# Altium PCB CAN-to-CAN.PcbDoc
Units mil, origin at the board's own origin, x right, y up, seen from the top; angles counter-clockwise.
Board outline 6300 x 3720 mil, 2 copper layers (Top Layer, Bottom Layer); 110 components, 86 nets, 357 pads, 17 vias.
Unrouted connection lines stored in the file: 132.
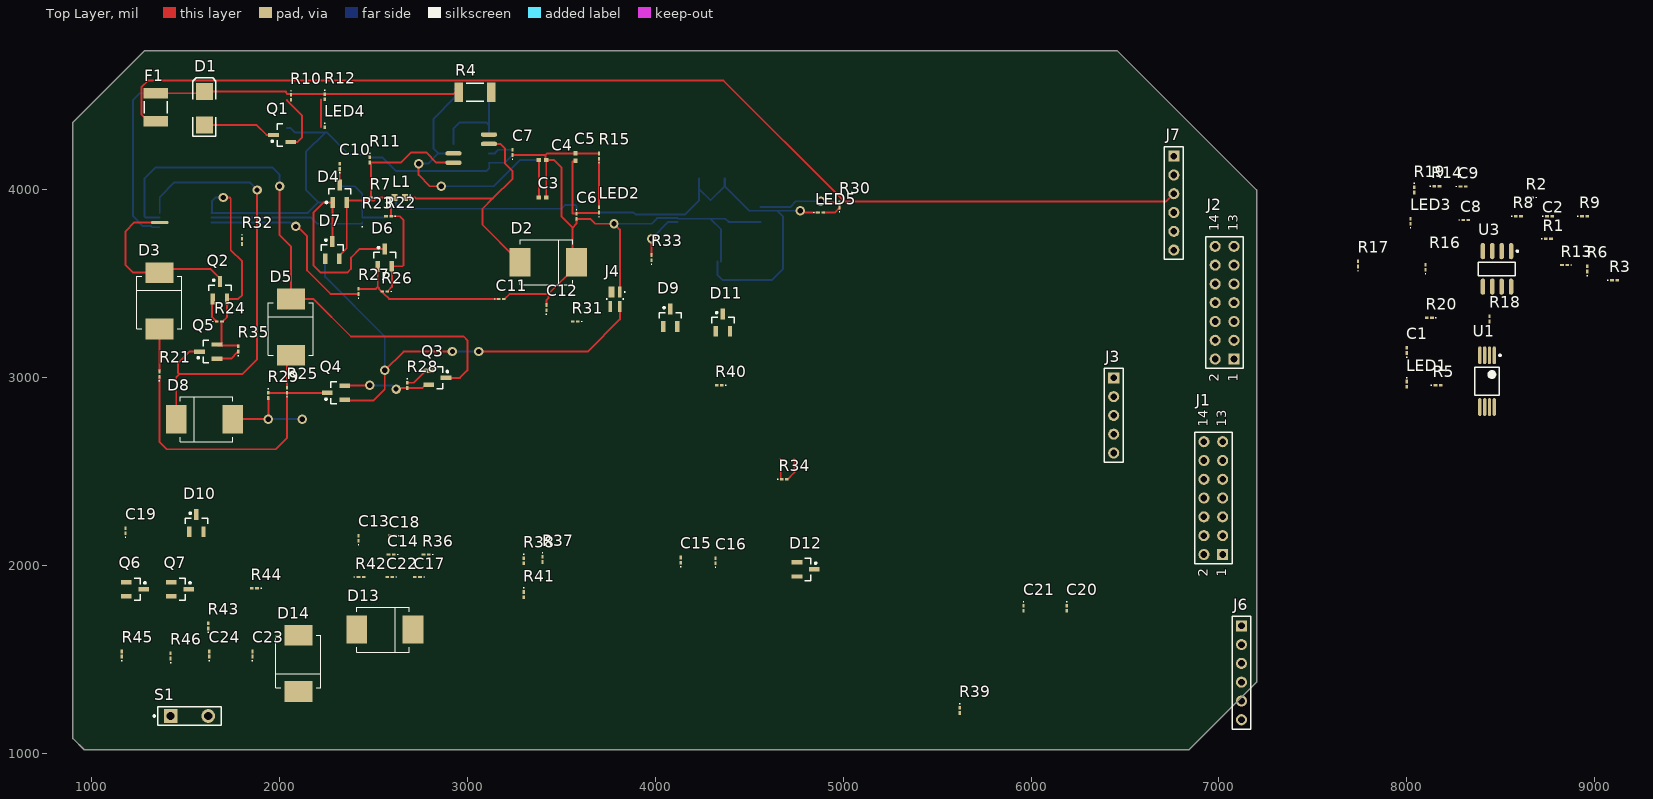
[diagram p0: Top Layer view]
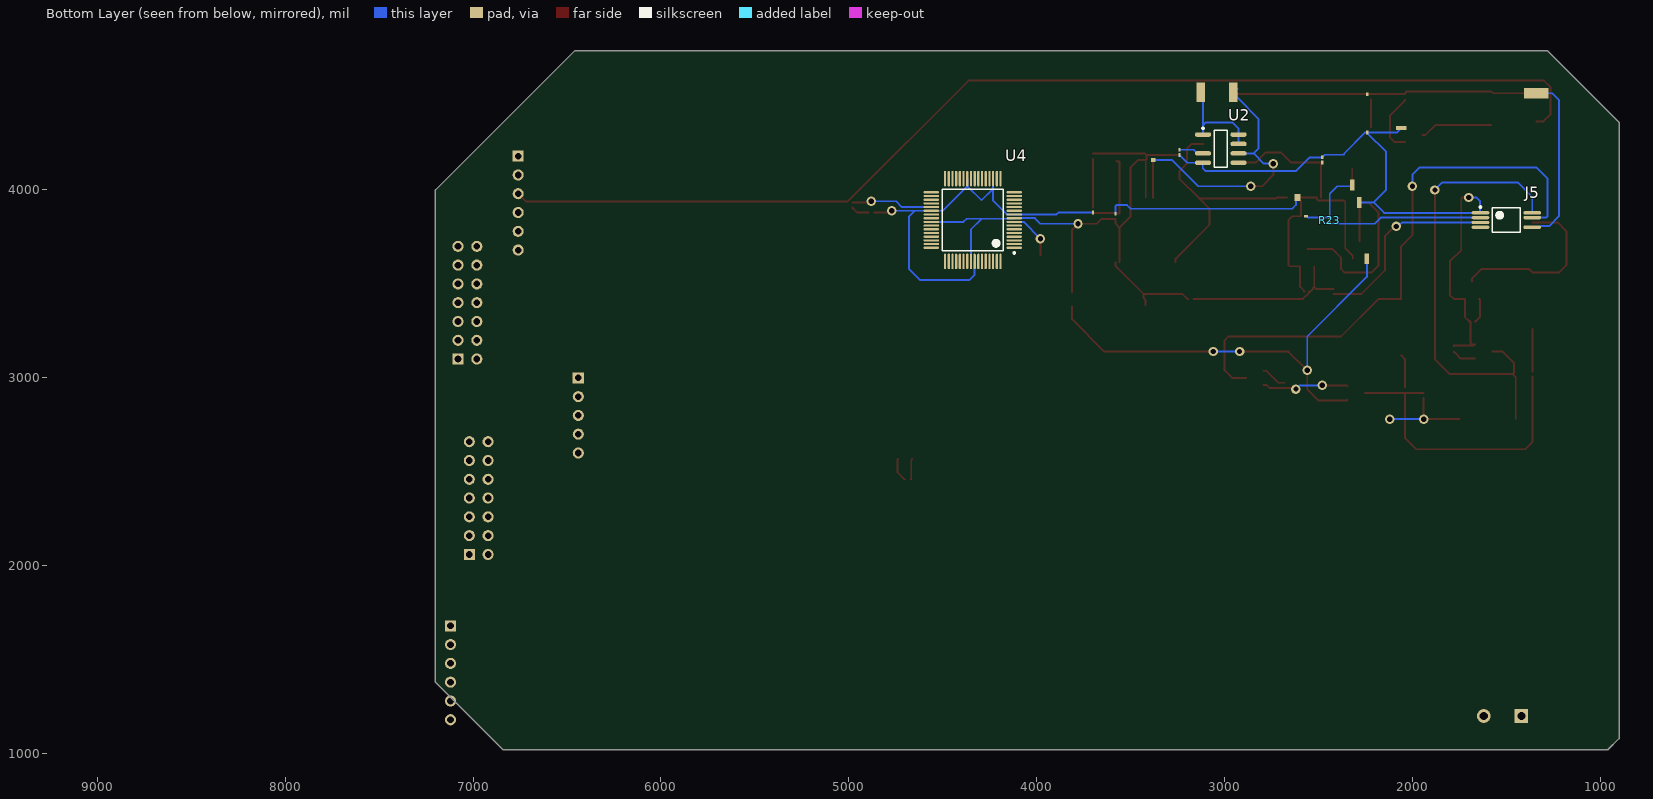
[diagram p1: Bottom Layer view, seen from below]

## Layer stack, top to bottom
Top Solder: solder mask 0.4, Solder Resist, Dk 3.5
Top Layer: signal copper 1.4
Dielectric 1: dielectric 12.6, FR-4, Dk 4.8
Bottom Layer: signal copper 1.4
Bottom Solder: solder mask 0.4, Solder Resist, Dk 3.5

## Board outline
960,1020 900,1080 900,4360 1280,4740 6460,4740 7200,4000 7200,1380 6840,1020

## Design rules (kind name [scope] priority, off if disabled: settings)
Clearance [All] p1: gap=6 ignorepadtopadclearanceinfootprint=FALSE except(0: SMDPad-Hole THPad-Hole Via-Hole Fill-Hole Poly-Hole Region-Hole Text-Hole; 10: THPad-THPad THPad-Via THPad-Fill THPad-Poly THPad-Region THPad-Text Via-Via Via-Fill Via-Poly Via-Region Via-Text Fill-Fill Fill-Poly Fill-Region Fill-Text Poly-Poly Poly-Region Poly-Text Region-Region Region-Text Text-Text)
PolygonConnect [All] p1: connectstyle=Relief reliefconductorwidth=10 reliefentries=4 polygonreliefangle="90 Angle" airgapwidth=10
RoomDefinition CAN-to-CAN [InComponentClass('CAN-to-CAN')] p1: confinementstyle=ConfineIn formatcopy=TRUE lockcomponents=FALSE outline 7240,1100 7560,1100 7560,1460 7240,1460
RoutingVias [All] p1: holewidth=28 width=50 viastyle="Through Hole" minholewidth=28 minwidth=50 maxholewidth=28 maxwidth=50
SolderMaskExpansion [All] p1: expansion=4
Width [All] p1: maxlimit=10 minlimit=10 preferedwidth=10
30 further rules are at their usual default settings.

## Components (designator, comment, footprint, x,y, rotation, side; value= is the part's Value field where it differs from the comment)
C1 "100n" 0603#1 8000,3146.22 r90 top
C2 "4n7" 0603#1 8760,3860 r0 top value=100n
C3 "100n" 0402#1 3400,3960 r0 top
C4 "10u/16" 0402#2 3400,4160 r0 top value=470u/16
C5 "100u/6V3" 0402#1 3575,4175 r90 top value=470u/16
C6 "100n" 0603#2 3580,3860 r270 top
C7 "100p" 0603#3 3240,4200 r90 top value=100pF
C8 "100n" 0603#1 8313.78,3840 r0 top
C9 "4n7" 0603#1 8300,4018 r0 top value=100n
C10 "100n" 0603#1 2320,4125.84 r90 top
C11 "100n" 0603#1 3180,3420 r0 top
C12 "100n" 0603#1 3420,3373.78 r90 top
C13 "100n" 0603#1 2420,2146.22 r90 top
C14 "100n" 0603#1 2593.78,2060 r180 top
C15 "100n" 0603#1 4135,2030 r90 top
C16 "100n" 0603#1 4320,2026.22 r90 top
C17 "27p" 0603#1 2733.78,1940 r180 top value=100n
C18 "27p" 0603#1 2600,2160 r180 top value=100n
C19 "100n" 0603#1 1180,2186.22 r90 top
C20 "100n" 0603#1 6190,1773.78 r270 top
C21 "100n" 0603#1 5960,1773.78 r270 top
C22 "100n" 0603#1 2586.22,1940 r180 top
C23 "100n" 0603#1 1855,1530 r90 top
C24 "10n" 0603#1 1625,1530 r90 top value=100pF
D1 "P6SMB15A" SMB 1600,4435 r90 top
D2 "LL5817" DIODE_SMC 3430,3615 r180 top
D3 "LL4148" DIODE_SMC 1360,3410 r270 top
D4 "BAT54S" SOT-23_M 2320,3980 r90 top
D5 "LL4148" DIODE_SMC 2060,3270 r270 top
D6 "BAT54S" SOT23_M#1 2560,3640 r90 top
D7 "BAT54S" SOT23_M#2 2280,3680 r90 top
D8 "LL4148" DIODE_SMC 1600,2780 r0 top
D9 "BAT54S" SOT23_M#1 4080,3320 r90 top
D10 "BAT54S" SOT23_M#1 1557.4,2226.26 r90 top
D11 "BAT54S" SOT23_M#1 4360,3293.74 r90 top
D12 "BAT54S" SOT23_M#1 4800,1980 r0 top
D13 "LL4148" DIODE_SMC 2560,1660 r180 top
D14 "LL4448" DIODE_SMC 2100,1480 r90 top
F1 "Fuse 1" 1812 1340,4439.8 r90 top
J1 "Header 7X2" HDR2X7 7020,2060 r90 top
J2 "Header 7X2" HDR2X7 7080,3100 r90 top
J3 "ZL201" HDR1X5 6440,3000 r270 top
J4 "MX-43045-0400" SOT-343_M 3785.59,3418.39 r270 top
J5 "MX-43045-0800" DB008_M#1 1500,3840 r180 bottom
J6 "MX-43045-0600" HDR1X6 7120,1680 r270 top
J7 "MX-43045-0600" HDR1X6 6760,4180 r270 top
L1 "DL22-330" INDC1608L 2640,3960 r180 top value=100uH
LED1 "HCL-1904AYL" 0603#1 8000,2966.22 r270 top
LED2 "HCL-1903BG4" 0603#2 3700,3893.78 r90 top
LED3 "HCL-1906BR1" 0603#1 8020,3833.78 r90 top
LED4 "HCL-1904AYL" 0603#4 2240,4320 r270 top
LED5 "HCL-1906BR1" 0603#1 4880,3880 r0 top
Q1 "BSS138" SOT23_M#3 2013.74,4292.6 r180 top
Q2 "BSS123" SOT23_M#1 1682.6,3466.26 r90 top
Q3 "BSS123" SOT23_M#1 2840,3000 r0 top
Q4 "BSS123" SOT23_M#1 2300,2920 r180 top
Q5 "BSS123" SOT23_M#1 1620,3140 r180 top
Q6 "BSS123" SOT23_M#1 1230,1875 r0 top
Q7 "BSS123" SOT23_M#1 1470,1875 r0 top
R1 "CAN0001" 0603#1 8753.78,3740 r0 top
R2 "CAN0001" 0603#1 8653.78,3960 r180 top
R3 "nc" 0603#1 9106.22,3520 r0 top value=1K
R4 "1R" 12Z-2010 3040,4520 r180 top value=1K
R5 "4k7" 0603#1 8166.22,2960 r0 top value=1K
R6 "1k" 0603#1 8960,3580 r90 top value=1K
R7 "3k6 1%" 0603#1 2500,3960 r180 top value=1K
R8 "68" 0603#1 8593.78,3860 r0 top value=1K
R9 "68" 0603#1 8946.22,3860 r0 top value=1K
R10 "1M" 0603#1 2060,4493.78 r270 top value=1K
R11 "1k2 1%" 0603#3 2480,4160 r270 top value=1K
R12 "4k7" 0603#2 2240,4496.22 r270 top value=1K
R13 "CAN0001" 0603#1 8840,3600 r180 top
R14 "CAN0001" 0603#1 8160,4020 r0 top
R15 "1k8" 0603#1 3700,4180 r90 top value=1K
R16 "nc" 0603#1 8100,3588.57 r90 top value=1K
R17 "4k7" 0603#1 7740,3606.22 r90 top value=1K
R18 "1k" 0603#1 8440,3313.78 r90 top value=1K
R19 "68" 0603#1 8040,4000 r270 top value=1K
R20 "68" 0603#1 8120,3320 r180 top value=1K
R21 "10k" 0603#1 1360,3020 r90 top value=1K
R22 "10k" 0603#5 2580,3860 r180 top value=1K
R23 "1k" 0603#6 2440,3840 r90 top value=1K
R24 "4k7" 0603#1 1680,3300 r0 top value=1K
R25 "10k" 0603#1 2040,2933.78 r90 top value=1K
R26 "10k" 0603#1 2560,3460 r180 top value=1K
R27 "1k" 0603#1 2420,3460 r90 top value=1K
R28 "4k7" 0603#1 2680,2960 r270 top value=1K
R29 "10k" 0603#1 1940,2906.22 r270 top value=1K
R30 "1k8" 0603#1 4980,3920 r90 top value=1K
R31 "10k" 0603#1 3573.78,3300 r180 top value=1K
R32 "1k" 0603#1 1800,3726.22 r270 top value=1K
R33 "nc" 0603#1 3980,3640 r90 top value=1K
R34 "4k7" 0603#1 4686.22,2460 r0 top value=1K
R35 "4k7" 0603#1 1780,3153.78 r90 top value=1K
R36 "10k" 0603#1 2780,2060 r180 top value=1K
R37 "10k" 0603#1 3400,2033.78 r270 top value=1K
R38 "10k" 0603#1 3300,2026.22 r270 top value=1K
R39 "470" 0603#1 5620,1230 r270 top value=1K
R40 "1k" 0603#1 4340,2960 r180 top value=1K
R41 "1k" 0603#1 3300,1846.22 r270 top value=1K
R42 "4k7" 0603#1 2433.78,1940 r0 top value=1K
R43 "10k" 0603#1 1620,1680 r90 top value=1K
R44 "4k7" 0603#1 1866.22,1880 r180 top value=1K
R45 "4k7" 0603#1 1160,1530 r90 top value=1K
R46 "4k7" 0603#1 1420,1520 r90 top value=1K
S1 "DTSM32NB" SPST-2 1520,1200 r0 top
U1 "MCP2551-I/SN" DB008_M#2 8427.2,2982.2 r270 top
U2 "MC33063AD" SO8_N#1 3020,4220 r180 bottom
U3 "MCP2551-I/SN" SO8_N#2 8480,3580 r270 top
U4 "PIC30F5011" ST-64-2_M 4340,3840 r0 bottom

## Footprints (in the part's own frame and the unit in brackets; to place one, negate y for a bottom-side part, rotate by r counter-clockwise, add the part's x,y. Pads: shape width x height; smd on the part's side, far side on the other; paste and mask are expansions set on the pad)
12Z-2010 [mm] "Chip Resistor, Body 5.0x2.5mm, IPC High Density"
  rect 1.2x2.6 all layers, no hole: 1(-2.2,0) 2(2.2,0)
  silkscreen extent -1.2,-1.2 1.2,1.2, body extent -2.58,-1.33 2.58,1.33, height 0.9
0402#1 [mm] "Chip Capacitor, Body 1.0x0.5mm, IPC High Density"
  rect 0.6x0.5 smd: 1(-0.5,0) 2(0.5,0)
  body extent -0.55,-0.3 0.55,0.3, height 1.3
0402#2 [mm] "Chip Capacitor, Body 1.0x0.5mm, IPC High Density"
  rect 0.6x0.5 all layers, no hole: 1(-0.5,0)
  rect 0.6x0.5 smd: 2(0.5,0)
  body extent -0.55,-0.3 0.55,0.3, height 1.3
0603#1 [mm] "Chip Inductor, Body 0.6x0.3mm, IPC High Density"
  rect 0.5x0.3 smd: 1(-0.35,0) 2(0.35,0)
  silkscreen extent -0.9,-0.05 -0.9,0.05, body extent -0.33,-0.18 0.33,0.18, height 0.55
0603#2 [mm] "Chip Inductor, Body 0.6x0.3mm, IPC High Density"
  rect 0.5x0.3 all layers, no hole: 1(-0.35,0)
  rect 0.5x0.3 smd: 2(0.35,0)
  silkscreen extent -0.9,-0.05 -0.9,0.05, body extent -0.33,-0.18 0.33,0.18, height 0.55
0603#3 [mm] "Chip Inductor, Body 0.6x0.3mm, IPC High Density"
  rect 0.5x0.3 all layers, no hole: 1(-0.35,0) 2(0.35,0)
  silkscreen extent -0.9,-0.05 -0.9,0.05, body extent -0.33,-0.18 0.33,0.18, height 0.55
0603#4 [mm] "Chip Inductor, Body 0.6x0.3mm, IPC High Density"
  rect 0.5x0.3 smd: 1(-0.35,0)
  rect 0.5x0.3 smd far side: 2(0.35,0)
  silkscreen extent -0.9,-0.05 -0.9,0.05, body extent -0.33,-0.18 0.33,0.18, height 0.55
0603#5 [mm] "Chip Inductor, Body 0.6x0.3mm, IPC High Density"
  rect 0.5x0.3 smd: 1(-0.35,0)
  rect 0.5x0.3 all layers, no hole: 2(0.35,0)
  silkscreen extent -0.9,-0.05 -0.9,0.05, body extent -0.33,-0.18 0.33,0.18, height 0.55
0603#6 [mm] "Chip Inductor, Body 0.6x0.3mm, IPC High Density"
  rect 0.5x0.3 smd far side: 1(-0.35,0) 2(0.35,0)
  silkscreen extent -0.9,-0.05 -0.9,0.05, body extent -0.33,-0.18 0.33,0.18, height 0.55
1812 [mm] "Chip Capacitor, Body 4.5x3.2mm, IPC High Density"
  rect 1.4x3.3 smd: 1(-1.9,0)
  rect 1.4x3.3 all layers, no hole: 2(1.9,0)
  silkscreen extent -0.8,-1.55 0.8,1.55, body extent -2.4,-1.7 2.4,1.7, height 1.4
DB008_M#1 [mm] "SOP, 8-Leads, Body 3x5.3mm, Pitch 0.65mm, IPC Low Density"
  oval 2.4x0.45 smd: 1(-3.5,0.975) 2(-3.5,0.325) 3(-3.5,-0.325) 4(-3.5,-0.975) 5(3.5,-0.975) 7(3.5,0.325) 8(3.5,0.975)
  oval 2.4x0.45 smd far side: 6(3.5,-0.325)
  silkscreen extent -3.63,-1.65 1.9,1.87, body extent -2.8,-1.65 2.8,1.65, height 2
DB008_M#2 [mm] "SOP, 8-Leads, Body 3x5.3mm, Pitch 0.65mm, IPC Low Density"
  oval 2.4x0.45 smd: 1(-3.5,0.975) 2(-3.5,0.325) 3(-3.5,-0.325) 4(-3.5,-0.975) 5(3.5,-0.975) 6(3.5,-0.325) 7(3.5,0.325) 8(3.5,0.975)
  silkscreen extent -3.62,-1.65 1.9,1.88, body extent -2.8,-1.65 2.8,1.65, height 2
DIODE_SMC [mil] "Diode; 2 Leads"
  rect 110x150 smd: 1(-150,0) 2(150,0)
  silkscreen extent -130,-120 150,120
HDR1X5 [mm] "Connector; Header; 5 Position"
  rect 1.5x1.5 hole 0.9: 1(0,0)
  round 1.5 hole 0.9: 2(2.54,0) 3(5.08,0) 4(7.62,0) 5(10.16,0)
  silkscreen extent -1.27,-1.27 11.43,1.27
HDR1X6 [mm] "Connector; Header; 6 Position"
  rect 1.5x1.5 hole 0.9: 1(0,0)
  round 1.5 hole 0.9: 2(2.54,0) 3(5.08,0) 4(7.62,0) 5(10.16,0) 6(12.7,0)
  silkscreen extent -1.27,-1.27 13.97,1.27
HDR2X7 [mm] "Connector; Header; 7x2 Position"
  rect 1.5x1.5 hole 0.9: 1(0,0)
  round 1.5 hole 0.9: 2(0,2.54) 3(2.54,0) 4(2.54,2.54) 5(5.08,0) 6(5.08,2.54) 7(7.62,0) 8(7.62,2.54) 9(10.16,0) 10(10.16,2.54) 11(12.7,0) 12(12.7,2.54) 13(15.24,0) 14(15.24,2.54)
  silkscreen extent -1.27,-1.27 16.51,3.81
INDC1608L [mm] "Chip Inductor, Body 1.6x0.8mm, IPC High Density"
  rect 0.8x0.9 smd: 1(-0.7,0)
  rect 0.8x0.9 all layers, no hole: 2(0.7,0)
  silkscreen extent -1.4,-0.35 -1.4,0.35, body extent -0.87,-0.48 0.87,0.48, height 0.55
SMB [mm] "DO-214-AA/SMB; 2 C-Bend Leads; Body 5.3 x 3.6 mm, inc. leads (LxW)"
  rect 2.3x2.3 smd: 1(-2.25,0) 2(2.25,0)
  silkscreen extent -3.8,-1.55 4.1,1.55
SO8_N#1 [mm] "SOIC, 8-Leads, Body 4.9x3.9mm, Pitch 1.27mm, IPC Medium Density"
  oval 2.2x0.6 all layers, no hole: 1(-2.4,1.905) 5(2.4,-1.905) 6(2.4,-0.635)
  oval 2.2x0.6 smd far side: 2(-2.4,0.635)
  oval 2.2x0.6 smd: 3(-2.4,-0.635) 4(-2.4,-1.905) 7(2.4,0.635) 8(2.4,1.905)
  silkscreen extent -2.53,-2.5 0.9,2.88, body extent -2,-2.5 2,2.5, height 1.75
SO8_N#2 [mm] "SOIC, 8-Leads, Body 4.9x3.9mm, Pitch 1.27mm, IPC Medium Density"
  oval 2.2x0.6 smd: 1(-2.4,1.905) 2(-2.4,0.635) 3(-2.4,-0.635) 4(-2.4,-1.905) 5(2.4,-1.905) 6(2.4,-0.635) 7(2.4,0.635) 8(2.4,1.905)
  silkscreen extent -2.52,-2.5 0.9,2.88, body extent -2,-2.5 2,2.5, height 1.75
SOT23_M#1 [mm] "SOT23, 3-Leads, Body 2.9x1.3mm, Pitch 0.95mm, Lead Span 2.3mm - Reverse Pinning, IPC Low Density"
  rect 1.45x0.6 smd: 1(1.175,0) 2(-1.175,-0.95) 3(-1.175,0.95)
  silkscreen extent -0.1,-1.5 1.47,1.5, body extent -0.7,-1.5 0.7,1.5, height 1.1
SOT23_M#2 [mm] "SOT23, 3-Leads, Body 2.9x1.3mm, Pitch 0.95mm, Lead Span 2.3mm - Reverse Pinning, IPC Low Density"
  rect 1.45x0.6 smd: 1(1.175,0) 2(-1.175,-0.95)
  rect 1.45x0.6 all layers, no hole: 3(-1.175,0.95)
  silkscreen extent -0.1,-1.5 1.47,1.5, body extent -0.7,-1.5 0.7,1.5, height 1.1
SOT23_M#3 [mm] "SOT23, 3-Leads, Body 2.9x1.3mm, Pitch 0.95mm, Lead Span 2.3mm - Reverse Pinning, IPC Low Density"
  rect 1.45x0.6 smd: 1(1.175,0) 3(-1.175,0.95)
  rect 1.45x0.6 smd far side: 2(-1.175,-0.95)
  silkscreen extent -0.1,-1.5 1.47,1.5, body extent -0.7,-1.5 0.7,1.5, height 1.1
SOT-23_M [mm] "SOT23, 3-Leads, Body 2.9x1.3mm, Pitch 0.95mm, Lead Span 2.5mm, IPC Low Density"
  rect 1.45x0.6 all layers, no hole: 1(-1.175,0.95) 3(1.175,0)
  rect 1.45x0.6 smd: 2(-1.175,-0.95)
  silkscreen extent -1.3,-1.5 0.7,1.92, body extent -0.7,-1.5 0.7,1.5, height 1.1
SOT-343_M [mm] "SOT343, 4-Leads, Body 2x1.3 mm, Pitch 1.3mm, Lead Span 2.1mm, IPC Low Density"
  rect 1.45x0.5 smd: 1(-0.975,0.65) 3(0.975,-0.65) 4(0.975,0.65)
  rect 1.45x0.8 smd: 2(-0.975,-0.5)
  silkscreen extent -1.02,-1.1 0.1,1.35, body extent -0.7,-1.1 0.7,1.1, height 1
SPST-2 [mm] "Switch; 2 Leads"
  rect 1.85x1.85 hole 1.1: 1(-2.54,0)
  round 1.85 hole 1.1: 2(2.54,0)
  silkscreen extent -4.89,-1.27 4.28,1.27
ST-64-2_M [mm] "Thin QFP, 64-Leads, Body 10x10mm, Pitch 0.5mm, IPC Low Density"
  oval 2.1x0.3 smd: 1(-5.6,3.75) 2(-5.6,3.25) 3(-5.6,2.75) 4(-5.6,2.25) 5(-5.6,1.75) 6(-5.6,1.25) 7(-5.6,0.75) 8(-5.6,0.25) 9(-5.6,-0.25) 10(-5.6,-0.75) 11(-5.6,-1.25) 12(-5.6,-1.75) 13(-5.6,-2.25) 14(-5.6,-2.75) 15(-5.6,-3.25) 16(-5.6,-3.75) 33(5.6,-3.75) 34(5.6,-3.25) 35(5.6,-2.75) 36(5.6,-2.25) 37(5.6,-1.75) 38(5.6,-1.25) 39(5.6,-0.75) 40(5.6,-0.25) 41(5.6,0.25) 42(5.6,0.75) 43(5.6,1.25) 44(5.6,1.75) 45(5.6,2.25) 46(5.6,2.75) 47(5.6,3.25) 48(5.6,3.75)
  oval 0.3x2.1 smd: 17(-3.75,-5.6) 18(-3.25,-5.6) 19(-2.75,-5.6) 20(-2.25,-5.6) 21(-1.75,-5.6) 22(-1.25,-5.6) 23(-0.75,-5.6) 24(-0.25,-5.6) 25(0.25,-5.6) 26(0.75,-5.6) 27(1.25,-5.6) 28(1.75,-5.6) 29(2.25,-5.6) 30(2.75,-5.6) 31(3.25,-5.6) 32(3.75,-5.6) 49(3.75,5.6) 50(3.25,5.6) 51(2.75,5.6) 52(2.25,5.6) 53(1.75,5.6) 54(1.25,5.6) 55(0.75,5.6) 56(0.25,5.6) 57(-0.25,5.6) 58(-0.75,5.6) 59(-1.25,5.6) 60(-1.75,5.6) 61(-2.25,5.6) 62(-2.75,5.6) 63(-3.25,5.6) 64(-3.75,5.6)
  silkscreen extent -5.72,-4.15 4.15,4.57, body extent -5,-5 5,5, height 1.6

## Part data
C1 C2 C3 C6 C7 C8 C9 C10 C11 C12 C13 C14 C15 C16 C17 C18 C19 C20 C21 C22 C23 C24: library part Cap, "Capacitor", LatestRevisionDate=17-Jul-2002, LatestRevisionNote="Re-released for DXP Platform.", PackageReference=RAD-0.3, Published=8-Jun-2000, Publisher="Altium Limited"
C4 C5: library part "Cap Pol1", "Polarized Capacitor (Radial)", LatestRevisionDate=17-Jul-2002, LatestRevisionNote="Re-released for DXP Platform.", PackageReference=RB7.6-15, Published=8-Jun-2000, Publisher="Altium Limited"
D1: library part "D Zener", "Zener Diode", LatestRevisionDate=17-Jul-2002, LatestRevisionNote="Re-released for DXP Platform.", PackageReference=DIODE-0.7, Published=8-Jun-2000, Publisher="Altium Limited"
D2 D3 D5 D8 D13: library part 1N4148, "High Conductance Fast Diode", Code_JEDEC=DO-204-AH, ComponentLink1Description="Manufacturer Link", ComponentLink1URL=http://www.fairchildsemi.com/, ComponentLink2Description=Datasheet, ComponentLink2URL=http://www.fairchildsemi.com/ds/1N%2F1N4148.pdf, DatasheetDocument=1997, LatestRevisionDate=17-Jul-2002, LatestRevisionNote="Re-released for DXP Platform.", PackageReference=DO-35, Published=8-Jun-2000, Publisher="Altium Limited"
D4 D6 D7 D9 D10 D11 D12: "Schottky Barrier Double Diode", ComponentLink1Description="Manufacturer Link", ComponentLink1URL=http://www.semiconductors.philips.com/, ComponentLink2Description=Datasheet, ComponentLink2URL=http://www.semiconductors.philips.com/acrobat/datasheets/BAT54_SERIES_4.pdf, DatasheetVersion=4-Mar-2002, LatestRevisionDate=12-Dec-2006, LatestRevisionNote="IPC-7351 Footprint Added.", PackageDescription="3-Pin SOT-23 Package 0.95 mm Pitch, 2.3 mm Lead Span", PackageReference=SOT23, PackageVersion=May-1999, Published=17-Sep-2003, Publisher="Altium Limited"
D14: library part Diode, "Default Diode", PackageDocument=Sep-1996, Code_JEDEC=DO-214-AB, LatestRevisionDate=17-Jul-2002, LatestRevisionNote="Re-released for DXP Platform.", PackageReference=SMC, Published=8-Jun-2000, Publisher="Altium Limited"
F1: "Fuse", LatestRevisionDate=17-Jul-2002, LatestRevisionNote="Re-released for DXP Platform.", PackageReference=PIN-W2/E2.8, Published=8-Jun-2000, Publisher="Altium Limited"
J1 J2: "Header, 7-Pin, Dual row", LatestRevisionDate=17-Jul-2002, LatestRevisionNote="Re-released for DXP Platform.", Publisher="Altium Limited"
J3: library part CON5, "Connector"
J4: library part "Header 2X2", "Header, 2-Pin, Dual row", LatestRevisionDate=17-Jul-2002, LatestRevisionNote="Re-released for DXP Platform.", Publisher="Altium Limited"
J5: library part "Header 4X2A", "Header, 4-Pin, Dual row", LatestRevisionDate=17-Jul-2002, LatestRevisionNote="Re-released for DXP Platform.", Publisher="Altium Limited"
J6 J7: library part "Header 6", "Header, 6-Pin", LatestRevisionDate=17-Jul-2002, LatestRevisionNote="Re-released for DXP Platform.", Publisher="Altium Limited"
L1: library part "Inductor Iron", "Magnetic-Core Inductor", Published=24-Mar-1999, Publisher="Altium Limited", Revision="July-2002: Re-released for DXP Platform."
LED1 LED2 LED3 LED4 LED5: library part LED3, "Typical BLUE SiC LED", Published=8-Jun-2000, Publisher="Altium Limited", Revision 1="Jul-2002: Re-released for DXP Platform.", Revision 2="17-Dec-2003: PCB Footprint replaced."
Q1: "N-Channel Enhancement Mode Vertical DMOS FET", ComponentLink1Description="Manufacturer Link", ComponentLink1URL=http://www.zetex.com/, ComponentLink2Description=Datasheet, ComponentLink2URL=www.zetex.com/3.0/pdf/BSS138.pdf, DatasheetVersion=Mar-96, PackageDescription="SOT-23; 3 Leads; Body 3.1 x 2.5 mm, inc. leads (LxW max), Alternate Lead Configuration", PackageReference=SOT23, PackageVersion=1996, Published=17-Dec-2003, Publisher="Altium Limited"
Q2 Q3 Q4 Q5 Q6 Q7: "N-channel Enhancement Mode Vertical D-MOSFET", ComponentLink1Description="Manufacturer Link", ComponentLink1URL=http://www.semiconductors.philips.com/, ComponentLink2Description=Datasheet, ComponentLink2URL=http://www.semiconductors.philips.com/acrobat/datasheets/BSS123_3.pdf, DatasheetVersion=Apr-1995, LatestRevisionDate=12-Dec-2006, LatestRevisionNote="IPC-7351 Footprint Added.", PackageDescription="3-Pin SOT-23 Package 0.95 mm Pitch, 2.3 mm Lead Span", PackageReference=SOT23, PackageVersion=May-1999, Published=17-Sep-2003, Publisher="Altium Limited"
R1 R2 R13 R14: library part "Res Varistor", "Varistor (Voltage-Sensitive Resistor)", LatestRevisionDate=04-Mar-2005, LatestRevisionNote="PCB Footprint replaced.", PackageReference=6-0805, Published=24-Mar-1999, Publisher="Altium Limited"
R3 R4 R5 R6 R7 R8 R9 R10 R11 R12 R15 R16 R17 R18 R19 R20 R21 R22 R23 R24 R25 R26 R27 R28 R29 R30 R31 R32 R33 R34 R35 R36 R37 R38 R39 R40 R41 R42 R43 R44 R45 R46: library part Res2, "Resistor", LatestRevisionDate=17-Jul-2002, LatestRevisionNote="Re-released for DXP Platform.", PackageReference=AXIAL-0.4, Published=8-Jun-2000, Publisher="Altium Limited"
S1: library part PUSHB, "Switch PushButton"
U1 U3: "High Speed CAN Transceiver, 8-Pin Plastic SOIC, Industrial Grade", Code_JEDEC=MS-012, ComponentLink1Description="Manufacturer Link", ComponentLink1URL=http://www.microchip.com, ComponentLink2Description=Datasheet, ComponentLink2URL=http://ww1.microchip.com/downloads/en/DeviceDoc/21667d.pdf, DatasheetVersion=Nov-2003, LatestRevisionDate=13-Apr-2006, LatestRevisionNote="IPC-7351 Footprint Added.", PackageDescription="8-Pin Plastic Narrow Body Small Outline Integrated Circuit 1.27 mm Pitch", PackageReference=SOIC150-8, PackageVersion=Oct-2005, Published=6-Oct-2005, Publisher="Altium Limited"
U2: "DC-to-DC Converter Control Circuit", Code_IPC=SOIC127P600-8, Code_JEDEC=MS-012-AA, ComponentLink1Description="Manufacturer Link", ComponentLink1URL=http://www.onsemi.com/site/products/taxonomy/0,4438,503,00.html, ComponentLink2Description=Datasheet, ComponentLink2URL=http://www.onsemi.com/pub/Collateral/MC34063A-D.PDF, DatasheetVersion=1988, LatestRevisionDate=13-Apr-2006, LatestRevisionNote="IPC-7351 Footprint Added.", PackageDescription="8-Pin Small Outline Integrated Circuit 1.27 mm Pitch", PackageReference=751-02, Published=17-Jul-2002, Publisher="Altium Limited"
U4: "PIC30F5011 - Up"

## Via types
v1: diameter 50, hole 28, Top Layer to Bottom Layer, 17 vias

## Nets (pads, with @x,y where several pads share a name; then routed paths per layer and width w, separated by ;. In a path a pad name is that pad's centre, name@x,y a point inside that pad or via, vN(x,y) a via of type N, cw(c..) or ccw(c..) an arc to the next point about the centre after c; other vN are vias at no path point)
+5V: C1.1 C5.1 C6.1 C8.1 C13.1 C14.1 C15.1 C16.1 C22.1 D4.2 D6.2 D7.2 D9.2 D10.2 D11.2 D12.2 D13.2 D14.2 J1.2 J2.2 J2.4 J2.6 J3.2 J4.2 L1.2 LED1.1 LED2.1 LED3.1 LED5.1 R7.1 R22.1 R26.1 R31.1 R36.1 R37.1 R38.1 R42.1 R43.2 U1.3 U3.3 U4.10 U4.19 U4.26 U4.38 U4.57 | length 5017.6
  Top Layer w10: D7.2 2317.4,3650.47 2357.4,3690.47 D4.2 2357.4,3936.28 2364.21,3943.09 2500.62,3943.09 2508.94,3951.41 2508.94,3959.09 2509.84,3960 R7.1 L1.2 2612.44,3958.03 2593.78,3939.37 R22.1 2640,3860 2660,3840 2660,3600 2653.74,3593.74 D6.2 2597.4,3483.62 2578.62,3464.84 2578.62,3460.91 2577.72,3460 R26.1 ; C5.1 3570.91,4151.22 3559.09,4151.22 3559.09,3874.68 3560,3873.78 C6.1 3580,3875.98 3580.91,3876.89 3699.09,3876.89 3700,3877.8 LED2.1 ; v1(4770.79,3889.21) 4781.61,3889.21 4790.82,3880 LED5.1
  Bottom Layer w10: L1.2 2620,3952.44 2620,3920 2640,3900 3500,3900 3520,3920 3575.08,3920 3580,3915.08 C6.1 ; LED2.1 3884.6,3880 3895.07,3869.53 U4.10 4119.87,3869.87 4159.53,3869.87 4232.08,3942.42 4232.08,4006.63 ; U4.19 4232.08,4060.13 4232.08,4006.63 ; U4.57 4330.16,3549.84 4360,3520 4620,3520 4680,3580 4680,3858.43 4649.21,3889.21 ; v1(4770.79,3889.21) 4649.21,3889.21 ; 4232.08,4006.63 4293.71,3945 4369.18,4020.47 4369.18,4060.13 U4.26 4369.87,4060.13 4369.87,4020.47 4501.13,3889.21 U4.38 4649.21,3889.21
+12V: C3.1 C4.1 D1.2 F1.2 J5.5 R4.2 R10.1 R12.1 U2.6 | length 4159.4
  Top Layer w10: F1.2 1571.02,4514.61 1580,4523.58 D1.2 2034.14,4523.58 2034.14,4517.35 2041.5,4510 R12.1 2924.76,4510 2943.39,4528.62 R4.2@2943.39,4550 ; v1(2740,4140) 2740,4080 2800,4020 v1(2860,4020) ; C3.1@3378.35,3960 C3.1 C4.1
  Bottom Layer w10: F1.2 1254.61,4514.61 1220,4480 1220,3860 1272.65,3807.35 1316,3807.35 1321.73,3801.61 J5.5 ; v1(2740,4140) 2790,4140 2845,4195 ; v1(2860,4020) 3140,4020 3280,4160 C4.1 ; U2.6 2845,4195 ; R4.2@2931.02,4537.64 R4.2@2943.39,4550 ; R4.2@2933.39,4520 2933.39,4492.44 2820,4379.06 2820,4220 2845,4195
+12VPWR: F1.1 J6.3 J7.3 | length 6028.7
  Top Layer w10: F1.1 1302.6,4365 1264.04,4403.56 1264.04,4546.72 1299.5,4582.18 4362.9,4582.18 5005.61,3939.47 6719.47,3939.47 J7.3
ADC0: J1.4
ADC1: J1.6
ADC2: J1.8
ADC3: J1.10
ADC4: J1.12
ButD: C10.1 D4.3 R22.2 R23.2 | length 480
  Top Layer w10: D4.3 C10.1
  Bottom Layer w10: D4.3 2326.26,4020 2400,4020 2440,3980 R23.2 2556.06,3853.78 2562.28,3860 R22.2
ButD_IN: J5.2 R23.1 | length 820.7
  Bottom Layer w10: J5.2 2167.2,3852.8 2200,3820 2433.78,3820 2435.16,3821.38 2439.09,3821.38 2440,3822.28 R23.1
ButN: C11.1 D6.3 R26.2 R27.2 | length 893.6
  Top Layer w10: R27.2 2512.76,3473.78 2522.6,3483.62 ; D6.3 2522.6,3483.62 ; C11.1 2582.47,3420 2551.06,3451.41 2551.06,3459.09 2550.16,3460 2542.28,3460 2528.46,3473.83 2528.46,3477.76 2522.6,3483.62
ButN_IN: J5.3 R27.1 | length 1047
  Top Layer w10: v1(2085.86,3805.86) 2094.14,3805.86 2146,3754 2146,3571.37 2271.15,3446.22 R27.1
  Bottom Layer w10: J5.3 2053.69,3827.2 2075.03,3805.86 v1(2085.86,3805.86)
ButR: C12.1 D9.3 R31.2 R32.2
ButR_IN: J5.4 R32.1
CAN_BMS_TX: R17.2
CAN_BMSS_H: J7.1 R13.2 R20.1 U3.7
CAN_BMSS_L: J7.2 R14.1 R19.1 U3.6
CAN_MUX_RX: U1.4
CAN_MUX_TX: R5.2 U1.1
CAN_MUXED_H: J6.1 R1.2 R9.1 U1.7
CAN_MUXED_L: J6.2 R2.1 R8.1 U1.6
ChrgLED: Q6.3 R45.1
ChrgLED_OUT: J7.6 Q6.1
FluidHeater: Q7.3 R46.1
FluidHeater_OUT: J6.6 Q7.1
GND: C1.2 C2.1 C3.2 C4.2 C5.2 C6.2 C7.1 C8.2 C9.1 C10.2 C11.2 C12.2 C13.2 C14.2 C15.2 C16.2 C17.2 C18.2 C19.2 C20.2 C21.2 C22.2 C23.1 C24.1 D2.1 D4.1 D6.1 D7.1 D9.1 D10.1 D11.1 D12.1 J1.14 J2.12 J2.14 J3.3 J4.1 J5.1 LED4.2 Q1.2 Q2.2 Q3.2 Q4.2 Q5.2 Q6.2 Q7.2 R1.1 R2.2 R6.2 R11.1 R13.1 R14.2 R15.2 R18.2 R24.2 R28.2 R34.2 R35.2 R45.2 R46.2 S1.1 U1.2 U2.4 U3.2 U4.9 U4.20 U4.25 U4.41 U4.56 | length 8887.7
  Top Layer w10: v1(1700,3960) 1734.14,3960 1740,3954.14 1740,3680 1800,3620 1800,3440 1780,3420 Q2.2 1720,3322.28 1697.72,3300 R24.2 1690.71,3300 1689.8,3299.09 1689.8,3184.21 1682.99,3177.4 Q5.2 1671.26,3172.4 1779.09,3172.4 1780,3171.5 R35.2 ; D7.1 2281.3,3727.56 2281.3,3932.44 2232.44,3932.44 2180,3880 2180,3600 2220,3560 2360,3560 2380,3580 2380,3640 2426.26,3686.26 D6.1 ; Q4.2 2347.56,2958.7 2478.7,2958.7 v1(2480,2960) ; v1@2640,2940 2646.22,2946.22 R28.2 2760.63,2946.22 2777.01,2962.6 Q3.2 ; C11.2 3197.72,3420 3223.94,3446.22 3431.22,3446.22 ; C7.1 3416.54,4186.22 ; C3.2 C4.2 ; C12.2 3420,3413.25 3431.22,3424.47 3431.22,3446.22 ; D2.1@3560,3615 3560,3800 ; D2.1 3580,3595 3431.22,3446.22 ; R15.2 3699.55,4194.23 3575,4194.23 3555.45,4194.23 3555,4194.69 3425,4194.69 3416.54,4186.22 ; J4.1 3811.18,3788.82 v1(3780,3820) 3680,3820 3653.78,3846.22 C6.2 3580,3820 3560,3800 ; R34.2 4703.94,2460 4740,2496.06 4740,2564.88 4737.4,2567.48 ; 3416.54,4186.22 3415.16,4184.84 3415.16,4164.53 C4.2 ; C4.2 3460,4160 3500,4120 3500,3860 3560,3800
  Bottom Layer w10: v1(1700,3960) 1660,3960 1640,3940 1640,3880.59 J5.1 2150.91,3878.39 2206.26,3933.74 ; Q1.2@2040,4330 2056.73,4330 2080.51,4306.22 LED4.2 ; D4.1 2206.26,3933.74 ; v1(2480,2960) 2600,2960 v1(2620,2940) ; C7.1 3240,4182.28 3239.09,4181.38 3235.16,4181.38 3198.78,4145 U2.4 3115.86,4143.63 3115.86,4115.86 3100,4100 2620,4100 2546.22,4173.78 R11.1 2480,4177.72 2479.09,4178.62 2475.16,4178.62 2466.22,4187.56 2365,4187.56 2365,4191.5 2250.28,4306.22 LED4.2 ; v1(3780,3820) 3980,3820 4009.84,3849.84 U4.9 4122.31,3847.06 4292.94,3847.06 ; U4.56 4349.5,3619.87 4349.5,3790.5 4292.94,3847.06 ; U4.41 4389.84,3830.16 4372.94,3847.06 4292.94,3847.06 ; 2206.26,3933.74 2140,4000 2140,4202.28 2240,4302.28 LED4.2
GPIOC13: J2.3
GPIOC14: J2.1
GPIOD0: J2.5
GPIOD1: J1.13
GPIOD2: J1.11
GPIOD3: J1.9
GPIOD4: J1.7
GPIOD5: J1.5
GPIOD6: J1.3
GPIOD7: J1.1
GPIOD8: J2.13
GPIOD9: J2.11
GPIOD10: J2.9
GPIOD11: J2.7
GROUND: D1.1 J6.4 J7.4 Q1.1 | length 389.8
  Top Layer w10: D1.1@1580,4346.42 1876.93,4346.42 1930.75,4292.6 Q1.1@1947.48,4292.6
ILUM: D7.3 J4.4 Q4.3 R34.1 | length 2611.1
  Top Layer w10: Q4.3 2348.86,2880 2500,2880 2560,2940 v1(2560,3040) 2660,3140 v1(2920,3140) ; v1(3060,3140) 3640,3140 3811.18,3311.18 J4.4 ; 4662.6,2567.48 4667.6,2562.48 4667.6,2460.91 4668.5,2460 R34.1
  Bottom Layer w10: D7.3 2242.6,3537.4 2560,3220 v1(2560,3040) ; v1(2920,3140) v1(3060,3140)
IMP: C19.1 D10.3 R36.2 R39.2
IMP_IN: J4.3 R39.1
IsFHerror: C21.1 D12.3 R38.2 R41.2
IsFHerror_IN: J6.5 R41.1
IsHeating: C20.1 D11.3 R37.2 R40.2
IsHeating_IN: J7.5 R40.1
LightD: Q2.3 R24.1 | length 135.3
  Top Layer w10: Q2.3 1640,3414.8 1640,3326.22 1661.38,3304.84 1661.38,3300.91 1662.28,3300 R24.1
LightD_OUT: D3.1 J5.6 Q2.1 | length 947
  Top Layer w10: J5.6 1227.2,3827.2 1180,3780 1180,3600 1220,3560 D3.1 1380,3580 1631.85,3580 1682.6,3529.25 Q2.1
LightN: Q3.3 R28.1 | length 140.1
  Top Layer w10: R28.1 2713.39,2973.78 2777.01,3037.4 Q3.3
LightN_OUT: D5.1 J5.7 Q3.1 | length 3072.9
  Top Layer w10: v1(2000,4020) 2000,3760 2060,3700 D5.1 2180,3420 2380,3220 2980,3220 3000,3200 3000,3040 2960,3000 Q3.1
  Bottom Layer w10: J5.7 1287.2,3852.8 1280,3860 1280,4060 1340,4120 1960,4120 2000,4080 v1@2000,4000
LightR: Q5.3 R35.1 | length 131.5
  Top Layer w10: Q5.3 1742.6,3102.6 1775.16,3135.16 1779.09,3135.16 1780,3136.06 R35.1
LightR_OUT: D8.1 J5.8 Q5.1 | length 2445.3
  Top Layer w10: D8.1 1450,3004.14 1465.86,3020 ; Q5.1 1520,3140 1460,3080 1460,3025.86 1465.86,3020 ; v1(1880,4000) 1880,3100 1800,3020 1465.86,3020
  Bottom Layer w10: J5.8 1362.2,3962.2 1440,4040 1840,4040 v1(1880,4000)
MCLR: J3.1 R44.1
NetC2_2: C2.2 R3.2 R8.2 R9.2
NetC7_2: C7.2 U2.3 | length 133.3
  Bottom Layer w10: U2.3 3146.34,4195 3165.12,4213.78 C7.2
NetC9_2: C9.2 R16.2 R19.2 R20.2
NetC17_1: C17.1 U4.39
NetC18_1: C18.1 U4.40
NetC24_2: C24.2 D14.1 R43.1 S1.2
NetD2_2: D2.2 L1.1 U2.2 | length 1327.8
  Top Layer w10: L1.1 2720,3960 2725,3955 3135,3955 ; U2.2 3175,4245 3200,4220 3200,4140 3240,4100 3240,4060 3135,3955 ; D2.2@3260,3615 3260,3635 3080,3815 3080,3900 3135,3955
NetD3_2: D3.2 R21.2 | length 226.2
  Top Layer w10: R21.2 D3.2
NetD5_2: D5.2 R25.2 | length 180.7
  Top Layer w10: R25.2 2040,3100 D5.2
NetD8_2: D8.2 R29.2 | length 482.4
  Top Layer w10: D8.2 v1(1940,2780) R29.2
  Bottom Layer w10: v1(1940,2780) v1(2120,2780)
NetLED1_2: LED1.2 R5.1
NetLED2_2: LED2.2 R15.1 | length 258.7
  Top Layer w10: LED2.2 R15.1
NetLED3_2: LED3.2 R17.1
NetLED4_1: LED4.1 R12.2 | length 148.7
  Top Layer w10: 2220,4333.78 2220,4482.44
NetLED5_2: LED5.2 R30.1 | length 99.4
  Top Layer w10: LED5.2 4953.78,3880 4975.16,3901.38 4979.09,3901.38 4980,3902.28 R30.1
NetQ1_3: Q1.3 R10.2 | length 323.4
  Top Layer w10: Q1.3@2040,4255.2 2095.2,4255.2 2120,4280 2120,4396.06 2040,4476.06 2040,4480
NetQ4_1: Q4.1 R21.1 R25.1 R29.1 | length 1621.4
  Top Layer w10: R21.1 1360,2660 1400,2620 1980,2620 2040,2680 R25.1 ; R29.1 R25.1 ; Q4.1 R25.1
NetR3_1: R3.1 U1.5
NetR4_1: R4.1 U2.1 U2.7 U2.8 | length 519.8
  Bottom Layer w10: U2.7 U2.8 2925.51,4325.51 2960,4360 3100,4360 3114.49,4345.51 ; U2.1 3114.49,4345.51 ; R4.1 3114.49,4507.87 3114.49,4345.51
NetR6_1: R6.1 U1.8
NetR7_2: R7.2 R11.2 U2.5 | length 679.9
  Top Layer w10: R7.2 2486.22,4136.06 2480,4142.28 R11.2 2480.61,4145.61 2645.61,4145.61 2700,4200 2780,4200 2834.39,4145.61 2924.9,4145.61 U2.5
NetR16_1: R16.1 U3.5
NetR18_1: R18.1 U3.8
NetR30_2: R30.2 U4.37 | length 435
  Top Layer w10: v1(4880,3940) 4886.22,3933.78 R30.2
  Bottom Layer w10: U4.37 4717.23,3908.9 4748.34,3940 v1(4880,3940)
NetR33_2: R33.2 U4.8 | length 263.1
  Top Layer w10: R33.2 v1(3980,3740)
  Bottom Layer w10: v1(3980,3740) 4069.81,3829.81 4119.18,3829.81 U4.8
PGC: J3.5
PGD: J3.4
RESET: C23.2 D13.1 R42.2 R44.2
RX: J2.10
TX: J2.8
WDI: R33.1
pads on no net: U3.1 U3.4 U4.1 U4.2 U4.3 U4.4 U4.5 U4.6 U4.7 U4.11 U4.12 U4.13 U4.14 U4.15 U4.16 U4.17 U4.18 U4.21 U4.22 U4.23 U4.24 U4.27 U4.28 U4.29 U4.30 U4.31 U4.32 U4.33 U4.34 U4.35 U4.36 U4.42 U4.43 U4.44 U4.45 U4.46 U4.47 U4.48 U4.49 U4.50 U4.51 U4.52 U4.53 U4.54 U4.55 U4.58 U4.59 U4.60 U4.61 U4.62 U4.63 U4.64

## Silkscreen, mask and mechanical layers (free items; w line width, h text height)
Mechanical 15:
  lines w10: 900,1080 960,1020 6840,1020 7200,1380 7200,4000 6460,4740 2040,4740 1280,4740 900,4360 900,1080

## Text inside footprints (layer, text, board x,y; h text height)
J1: Top Overlay "2" at 6940,1940 h50 r90; Top Overlay "1" at 7040,1940 h50 r90; Top Overlay "14" at 6940,2740 h50 r90; Top Overlay "13" at 7040,2740 h50 r90
J2: Top Overlay "2" at 7000,2980 h50 r90; Top Overlay "1" at 7100,2980 h50 r90; Top Overlay "14" at 7000,3780 h50 r90; Top Overlay "13" at 7100,3780 h50 r90